# Altium PCB AX-12_PSU.PcbDoc
Units mil, origin at the board's own origin, x right, y up, seen from the top; angles counter-clockwise.
Board outline 2355 x 875 mil, 2 copper layers (Top Layer, Bottom Layer); 29 components, 14 nets, 62 pads, 63 vias.
Unrouted connection lines stored in the file: 43.
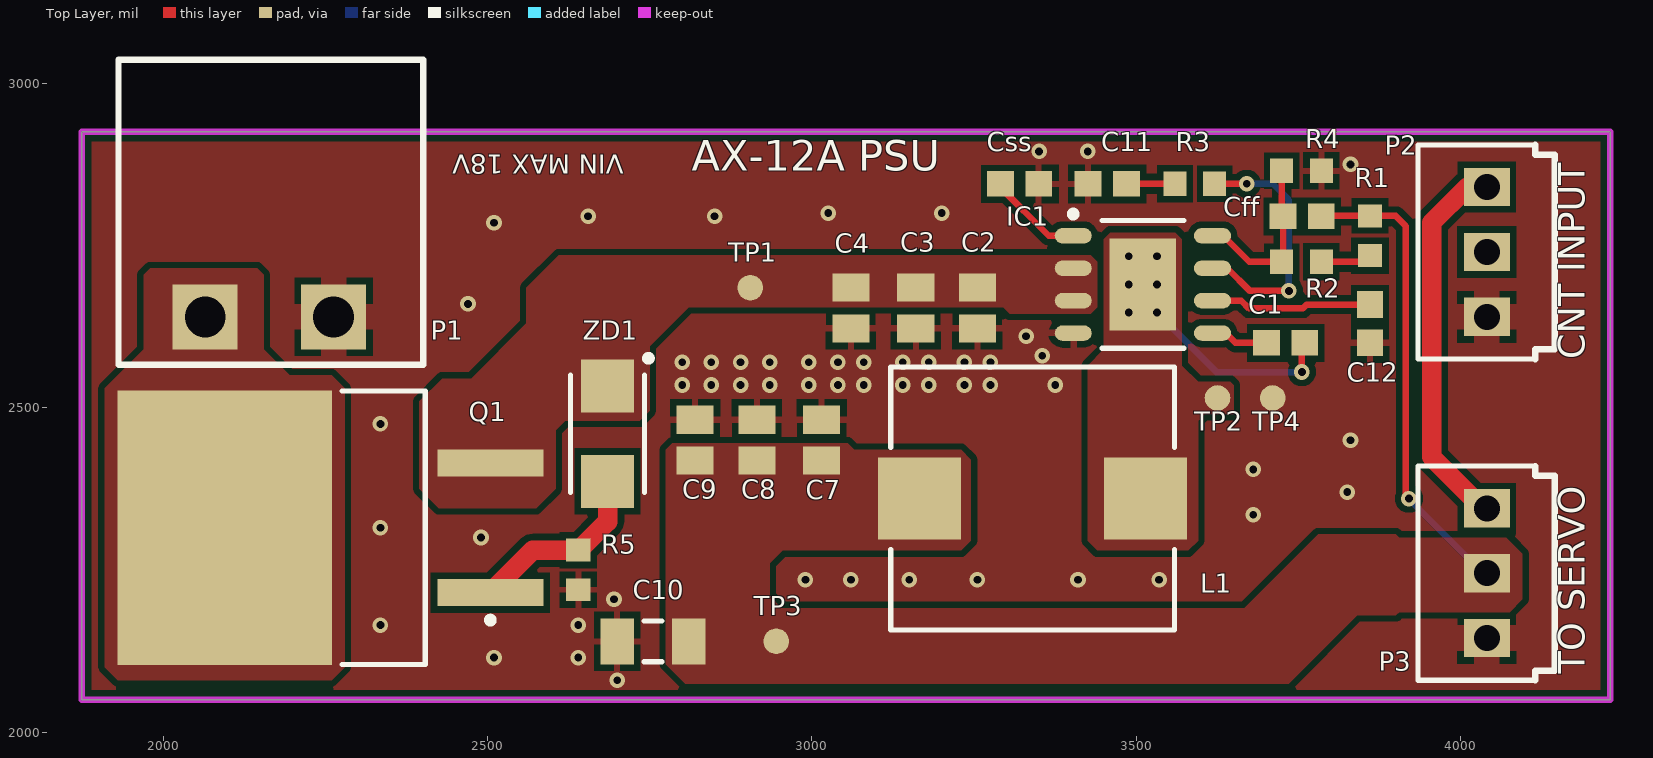
[diagram p0: Top Layer view]
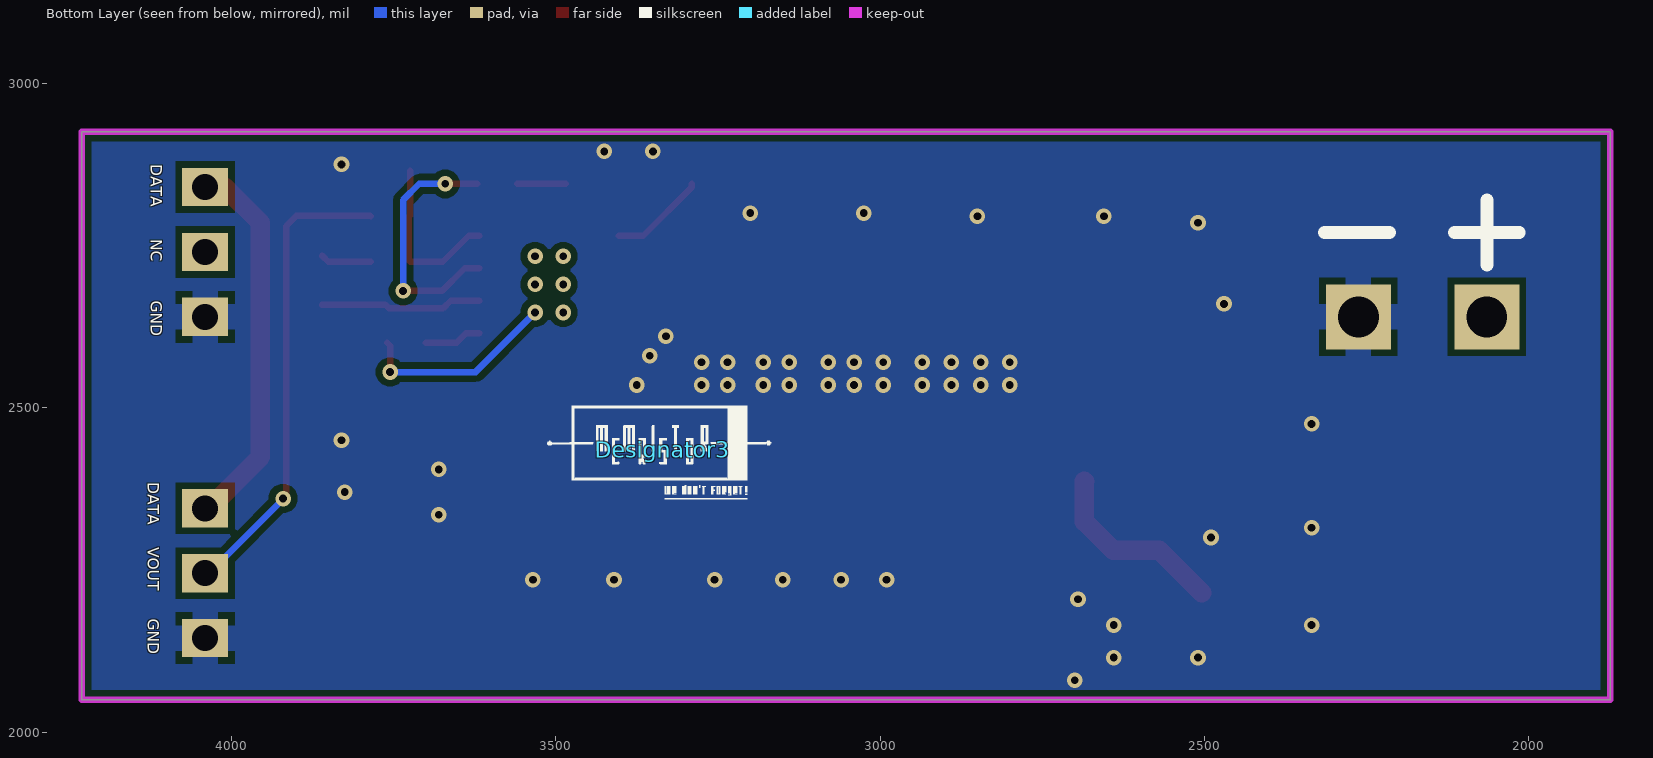
[diagram p1: Bottom Layer view, seen from below]
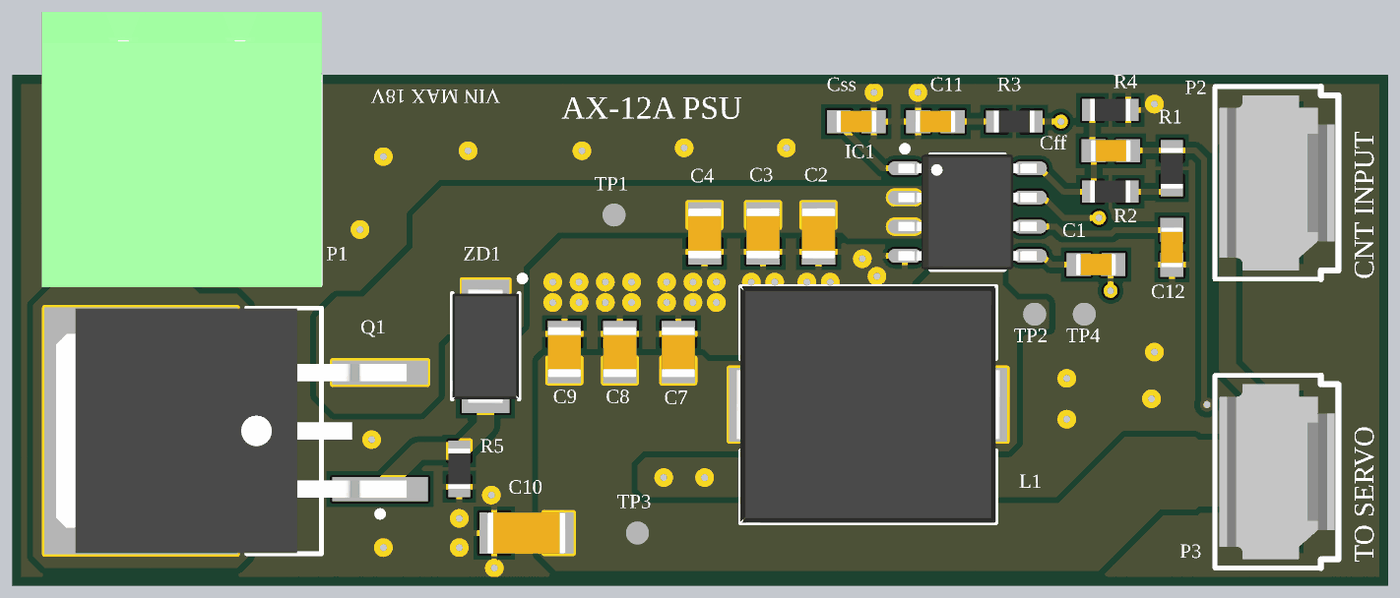
[diagram p2: 3D render of the assembled board from above, using the file's embedded part models]

## Layer stack, top to bottom
Top Solder: solder mask 0.4, Solder Resist, Dk 3.5
Top Layer: signal copper 1.4
Dielectric 1: dielectric 12.6, FR-4, Dk 4.8
Bottom Layer: signal copper 1.4
Bottom Solder: solder mask 0.4, Solder Resist, Dk 3.5

## Board outline
1875,2050 1875,2925 4230,2925 4230,2050

## Design rules (kind name [scope] priority, off if disabled: settings)
Clearance [All] p1: gap=10 ignorepadtopadclearanceinfootprint=FALSE except(0: Arc-Hole Track-Hole SMDPad-Hole THPad-Hole Via-Hole Fill-Hole Poly-Hole Region-Hole Text-Hole)
PolygonConnect PolygonConnect_3 [InNet('NetP1_2')] p1: connectstyle=Direct reliefconductorwidth=10 reliefentries=4 polygonreliefangle="90 Angle" airgapwidth=10
PolygonConnect PolygonConnect_2 [HasFootprint('TestPoint')] p2: connectstyle=Direct reliefconductorwidth=10 reliefentries=4 polygonreliefangle="90 Angle" airgapwidth=10
PolygonConnect PolygonConnect_1 [InNetClass('HIGH_current')] p3: connectstyle=Direct reliefconductorwidth=10 reliefentries=4 polygonreliefangle="90 Angle" airgapwidth=10
PolygonConnect [InNetClass('signals')] p4: thpad.connectstyle=Relief thpad.reliefconductorwidth=40 thpad.reliefentries=4 thpad.polygonreliefangle="90 Angle" thpad.airgapwidth=10 smdpad.connectstyle=Relief smdpad.reliefconductorwidth=10 smdpad.reliefentries=4 smdpad.polygonreliefangle="90 Angle" smdpad.airgapwidth=10 via.connectstyle=Direct via.reliefconductorwidth=10 via.reliefentries=4 via.polygonreliefangle="90 Angle" via.airgapwidth=10
RoutingVias [All] p1: holewidth=12 width=24 viastyle="Through Hole" minholewidth=12 minwidth=24 maxholewidth=12 maxwidth=24
SolderMaskExpansion [All] p1: expansion=4 istentingtop=FALSE
Width [All] p1: maxlimit=50 minlimit=10 preferedwidth=30
30 further rules are at their usual default settings.

## Classes and differential pairs
net class signals: DATA FB GND NetC1_1 NetC11_2 NetC12_2 NetCss_2 NetIC1_7 NetP1_2 NetQ1_1 NetR1_1
net class HIGH_current: LX VIN VOUT
component class AX-12_PSU: C1 C2 C3 C4 C7 C8 C9 C10 C11 C12 Cff Css L1 P1 P2 P3 Q1 R1 R2 R3 R4 R5 TP1 TP2 TP3 TP4 ZD1

## Components (designator, comment, footprint, x,y, rotation, side; value= is the part's Value field where it differs from the comment)
C1 "10nf" CAP_0603 3730,2600 r0 top
C2 "22uf" CAP_0805 3255,2653.5 r90 top
C3 "10uf" CAP_0805 3160,2653.5 r90 top
C4 "4.7uf" CAP_0805 3060,2653.5 r90 top
C7 "4.7uf" CAP_0805 3015,2450 r270 top
C8 "10uf" CAP_0805 2915,2450 r270 top
C9 "22uf" CAP_0805 2820,2450 r270 top
C10 "33uf" CAP_1206 2755,2140 r0 top
C11 "2.2nf" CAP_0603 3455,2845 r0 top
C12 "100nf" CAP_0603 3860,2629.53 r90 top
Cff "12pf" CAP_0603 3755.47,2795 r0 top
Css "10nf" CAP_0603 3320,2845 r180 top
Designator3 "Comment" Memristor_LOGO_small 3335,2435 r180 bottom
IC1 "AOZ6606PI" SOP127P600X170_HS-9N 3510,2690 r0 top
L1 "6.8uH" INDM108103X40N 3340,2360 r180 top
P1 "2EDGRC-5.08-02P-14-00A(H)" PWR_Con 2263,2640 r90 top
P2 "TE CONNECTIVITY_3PIN_MALE" "TE CONNECTIVITY_3PIN_MALE" 4040,2640 r90 top
P3 "TE CONNECTIVITY_3PIN_MALE" "TE CONNECTIVITY_3PIN_MALE" 4040,2145 r90 top
Q1 "IRF4905" DPAK254P1524X483-3N 2258.39,2315 r180 top
R1 "174Kohm" RES_0603 3860,2765 r90 top
R2 "1Kohm" RES_0603 3754.49,2725 r0 top
R3 "24Kohm" RES_0603 3590,2845 r0 top
R4 "10Kohm" RES_0603 3754.49,2865 r180 top
R5 "100Kohm" RES_0603 2640,2250 r90 top
TP1 "TestPoint" TestPoint 2905,2685 r90 top
TP2 "TestPoint" TestPoint 3625,2515 r90 top
TP3 "TestPoint" TestPoint 2945,2140 r90 top
TP4 "TestPoint" TestPoint 3710,2515 r90 top
ZD1 "10V" DIO_SMA 2685,2460 r270 top

## Footprints (in the part's own frame and the unit in brackets; to place one, negate y for a bottom-side part, rotate by r counter-clockwise, add the part's x,y. Pads: shape width x height; smd on the part's side, far side on the other; paste and mask are expansions set on the pad)
CAP_0603 [mm] "Chip Capacitor, 2-Leads, Body 1.60x0.80mm, IPC Medium Density"
  rect 1.05x1 smd: 1(-0.75,0) 2(0.75,0)
  body extent -0.87,-0.48 0.87,0.48, height 0.8
CAP_0805 [mm] "Chip Capacitor, 2-Leads, Body 2.00x1.25mm, IPC Medium Density"
  rect 1.1x1.45 smd: 1(-0.8,0) 2(0.8,0)
  body extent -1.1,-0.72 1.1,0.72, height 0.6
CAP_1206 [mm] "Chip Capacitor, 2-Leads, Body 3.20x1.60mm, IPC Medium Density"
  rect 1.3x1.8 smd: 1(-1.4,0) 2(1.4,0)
  silkscreen extent -0.35,-0.8 0.35,0.8, body extent -1.7,-0.9 1.7,0.9, height 0.9
DIO_SMA [mm] "Molded Diode, 2-Leads, Body 4.30x2.70mm, IPC Medium Density"
  rect 2.07x2.06 smd: 1(-1.865,0) 2(1.865,0)
  silkscreen extent -3.07,-1.45 2.3,1.73, body extent -2.52,-1.45 2.52,1.45, height 2.44
DPAK254P1524X483-3N [mm] "D2-PAK, 3-Pads, Body 7.93x8.70mm (max), IPC Medium Density"
  rect 4.15x1.05 smd: 1(-6.25,2.54) 3(-6.25,-2.54)
  rect 8.4x10.75 smd: 4(4.15,0)
  silkscreen extent -6.38,-5.35 -0.45,5.35, body extent -7.41,-5.33 7.84,5.33, height 4.83
INDM108103X40N [mm] "Molded Inductor, 2-Leads, Body 10.80x10.31mm, IPC Medium Density"
  rect 3.25x3.2 smd: 1(-4.425,0) 2(4.425,0)
  silkscreen extent -5.55,-5.15 5.55,5.15, body extent -5.77,-5.15 5.77,5.15, height 4
Memristor_LOGO_small [mil]
  silkscreen extent -178,-76 167,67
PWR_Con [mm]
  rect 2.54x2.54 hole 1.6: 1(0,0) 2(0,5.029)
  silkscreen extent -1.88,-3.51 10.06,8.42, body extent -2.01,-3.59 10,8.57, height 8.73
RES_0603 [mm] "Chip Resistor, 2-Leads, Body 1.60x0.80mm, IPC Medium Density"
  rect 0.9x0.95 smd: 1(-0.775,0) 2(0.775,0)
  body extent -0.87,-0.48 0.87,0.48, height 0.8
SOP127P600X170_HS-9N [mm] "SOP, 8-Leads, Body 4.90x3.90mm, Pitch 1.27mm, Thermal Pad 3.60x2.61mm, IPC Medium Density"
  oval 1.45x0.6 smd: 1(-2.725,1.905) 2(-2.725,0.635) 3(-2.725,-0.635) 4(-2.725,-1.905) 5(2.725,-1.905) 6(2.725,-0.635) 7(2.725,0.635) 8(2.725,1.905)
  rect 2.61x3.6 smd: 9(0,0)
  silkscreen extent -2.85,-2.5 1.6,2.88, body extent -3,-2.5 3,2.5, height 1.7
"TE CONNECTIVITY_3PIN_MALE" [mm] "BLUE_3PIN_CONECTOR"
  rect 1.5x1.8 hole 1.016: 1(0,0) 2(2.54,0) 3(5.08,0)
  silkscreen extent -1.65,-2.67 6.73,2.7, body extent -1.27,-2.5 6.35,2.5, height 11.43
TestPoint [mm] "1mm"
  round 1 smd mask+0: 1(0,0)

## Part data
C1 Css: library part 0000005, "CAP CER 10nF 0603 25V X7R", capaticanse=10nf, ComponentLink1Description=digikey, ComponentLink1URL=https://www.digikey.com/en/products/detail/kyocera-avx/06033C103MAT2A/1599370
C2 C9: library part 0000001, "CAP CER 22uF 0805 25V X5R", capaticanse=22uf, ComponentLink1Description=digikey, ComponentLink1URL=https://www.digikey.com/en/products/detail/tdk-corporation/C2012X5R1E226M125AC/3661564
C3 C8: library part 0000002, "CAP CER 10uF 0805 25V X5R", capaticanse=10uf, ComponentLink1Description=digikey, ComponentLink1URL=https://www.digikey.com/en/products/detail/tdk-corporation/C2012X5R1E106K125AB/2443462
C4 C7: library part 0000003, "CAP CER 4.7uF 0805 25V X5R", capaticanse=4.7uf, ComponentLink1Description=digikey, ComponentLink1URL=https://www.digikey.com/en/products/detail/kemet/C0805C475K3PAC7800/1950665
C10: library part 0000004, "CAP CER 33uF 1206 25V X5R", capaticanse=33uf, ComponentLink1Description=digikey, ComponentLink1URL=https://www.digikey.com/en/products/detail/tdk-corporation/C3216X5R1E336M160AC/2792259
C11: library part 0000006, "CAP CER 2.2nF 0603 25V X7R", capaticanse=2.2nf, ComponentLink1Description=digikey, ComponentLink1URL=https://www.digikey.com/en/products/detail/yageo/CC0603KRX7R8BB222/2345066
C12: library part 0000007, "CAP CER 100nF 0603 25V X7R", capaticanse=100nf, ComponentLink1Description=digikey, ComponentLink1URL=https://www.digikey.com/en/products/detail/kyocera-avx/06033C104K4T2A/8019250
Cff: library part 0000008, "CAP CER 12pF 0603 25V X7R", capaticanse=12pf, ComponentLink1Description=digikey, ComponentLink1URL=https://www.digikey.com/en/products/detail/kemet/C0603C120J3GACAUTO/11675595
L1: library part L000002, "IND 6.8uH 8A 23.3mOHM 13.5A ISAT", ComponentLink1Description=digikey, ComponentLink1URL=https://www.digikey.com/en/products/detail/vishay-dale/IHLP4040DZER6R8M01/1220696, inductanse=6.8uH
P1: library part 00000002, "TERM BLOCK HDR 2POS 90DEG 5.08MM", Manufacturer Part Number=2EDGRC-5.08-02P-14-00A(H), Price=0.1304, Suplier=TME, Suplier Product Link=https://www.tme.eu/en/details/2edgrc5.08-2p14/pluggable-terminal-blocks/degson-electronics/2edgrc-508-02p-14-00ah/
P2 P3: "BLUE_3PIN_CONECTOR", Manufacturer="TE CONNECTIVITY / AMP", Manufacturer Part Number 1=281695-3, Order Code 1=1205983, Price 1=£0.403, Supplier 1=uk.farnell.com
Q1: Case/Package=D2PAK, Continuous Drain Current (ID)=75A, Current Rating=49A, Drain to Source Breakdown Voltage=40V, Drain to Source Resistance=4mR, Drain-source On Resistance-Max=3.7MR, Dual Supply Voltage=55V, Gate to Source Voltage (Vgs)=20V, Input Capacitance=4.34nF, Manufacturer="International Rectifier", Manufacturer Part Number=IRF1404ZSPBF, Max Operating Temperature=175°C, Max Power Dissipation=200W, Min Operating Temperature=-55°C, Package Quantity=50, Power Dissipation=220W, Threshold Voltage=4V, Category=MOSFETs, Drain to Source Voltage (Vdss)=40V, Element Configuration=Single, Fall Time=58ns, Height=4.83mm, Lead Free="Lead Free", Length=10.67mm, Mount="Surface Mount", Nominal Vgs=4V, Number of Elements=1, Number of Pins=3, On-State Resistance=3.7MR, Packaging=Rail/Tube, Polarity=N-CHANNEL, Radiation Hardening=No, Rds On Max=3.7mR, REACH SVHC="No SVHC", Recovery Time=42ns, Rise Time=110ns, RoHS Compliant=Yes, Series=HEXFET®, Termination=SMD/SMT, Turn-Off Delay Time=36ns, Turn-On Delay Time=18ns, Voltage Rating (DC)=55V, Width=9.65mm
R1: library part R000003, "RES 174K OHM 1% 1/10W 0603", ComponentLink1Description=digikey, ComponentLink1URL=https://www.digikey.com/en/products/detail/stackpole-electronics-inc/RMCF0603FT174K/1761066, resistance=174Kohm
R2: library part R000004, "RES 1K OHM 1% 1/10W 0603", ComponentLink1Description=digikey, ComponentLink1URL=https://www.digikey.com/en/products/detail/vishay-beyschlag-draloric-bc-components/MCT06030C1001FP500/2607821, resistance=1Kohm
R3: library part R000005, "RES 24K OHM 1% 1/10W 0603", ComponentLink1Description=digikey, ComponentLink1URL=https://www.digikey.com/en/products/detail/stackpole-electronics-inc/RMCF0603FG24K0/1713826, resistance=24Kohm
R4: library part R000001, "RES 10K OHM 1% 1/10W 0603", ComponentLink1Description=digikey, ComponentLink1URL=https://www.digikey.com/en/products/detail/vishay-beyschlag-draloric-bc-components/MCT06030C1002FP500/1850440, resistance=10Kohm
R5: library part R000006, "RES 100K OHM 1% 1/10W 0603", ComponentLink1Description=digikey, ComponentLink1URL=https://www.digikey.com/en/products/detail/stackpole-electronics-inc/RMCF0603FG100K/1713543, resistance=100Kohm
TP1 TP2 TP3 TP4: library part TP001
ZD1: library part 1SMA5931-AU_R1, "Zener Diode 10 V 5 W ±5% Surface Mount SMC (DO-214AB)", ComponentLink1Description=digikey, ComponentLink1URL=https://www.digikey.com/en/products/detail/panjit-international-inc/1SMC5347-AU-R1-000A1/15799564
IC1: partName=AOZ6606PI

## Via types
v1: diameter 24, hole 12, Top Layer to Bottom Layer, 62 vias
v2: diameter 24, hole 12, Top Layer to Bottom Layer, tented both sides, 1 vias

## Nets (pads, with @x,y where several pads share a name; then routed paths per layer and width w, separated by ;. In a path a pad name is that pad's centre, name@x,y a point inside that pad or via, vN(x,y) a via of type N, cw(c..) or ccw(c..) an arc to the next point about the centre after c; other vN are vias at no path point)
DATA: P2.3 P3.3 | length 586.4
  Top Layer w30: P3.3 4034.09,2345 3955,2424.09 3955,2785 4010,2840 P2.3
FB: Cff.1 IC1.8 R2.1 R4.2 | length 264.9
  Top Layer w10: IC1.8 3634.02,2765 3674.02,2725 R2.1 3725.94,2726.97 Cff.1 3723.98,2796.97 R4.2
GND: C2.1 C3.1 C4.1 C7.1 C8.1 C9.1 C10.1 C11.1 C12.1 Css.1 IC1.4 P1.1 P2.1 P3.1 R4.1 R5.1 TP4.1
  other v1: 2700,2080 2510,2115 2640,2115 2335,2165 2640,2165 2695,2205 2990,2235 3060,2235 3150,2235 3255,2235 3410,2235 3535,2235 2490,2300 2335,2315 3680,2335 3825,2370 3680,2405 3830,2450 2335,2475 2800,2535 2845,2535 2890,2535 2935,2535 2995,2535 3040,2535 3080,2535 3140,2535 3180,2535 3235,2535 3275,2535 3375,2535 2800,2570 2845,2570 2890,2570 2935,2570 2995,2570 3040,2570 3080,2570 3140,2570 3180,2570 3235,2570 3275,2570 3355,2580 3330,2610 2470,2660 2510,2785 2655,2795 2850,2795 3025,2800 3200,2800 3830,2875 3350,2895 3425,2895
LX: C1.2 IC1.9 L1.1 TP2.1 | length 310.4
  Top Layer w10: v1(3531.65,2646.69) IC1.9@3533.82,2646.69 ; v1(3755,2555) 3755,2595.47 C1.2
  Bottom Layer w10: v1(3531.65,2646.69) 3623.35,2555 v1(3755,2555)
  other v1: 3488.35,2646.69 3488.35,2690 3531.65,2690 3488.35,2733.31 3531.65,2733.31
NetC1_1: C1.1 IC1.5 | length 89.4
  Top Layer w10: IC1.5 3637.7,2615 3652.7,2600 C1.1
NetC11_2: C11.2 R3.1 | length 75
  Top Layer w10: C11.2 R3.1
NetC12_2: C12.2 IC1.6 | length 250.2
  Top Layer w10: IC1.6 3661.72,2665 3673.72,2653 3756.49,2653 3762.54,2659.06 C12.2
NetCss_2: Css.2 IC1.1 | length 148.6
  Top Layer w10: Css.2 3290.47,2839.53 3365,2765 IC1.1
NetIC1_7: IC1.7 R3.2 | length 397.1
  Top Layer w10: IC1.7 3640,2715 3675,2680 v1(3735,2680) ; R3.2 v1(3670,2845)
  Bottom Layer w10: v1(3670,2845) 3710,2845 3735,2820 v1(3735,2680)
NetP1_2: P1.2 Q1.4
NetQ1_1: Q1.1 R5.2 ZD1.2 | length 288.2
  Top Layer w30: Q1.1 2569.96,2280.51 R5.2 2640.98,2280.51 2685,2324.53 2685,2386.06 2684.74,2386.32 ZD1.2
NetR1_1: R1.1 R2.2 | length 78.9
  Top Layer w10: R2.2 3850.51,2725 R1.1
VIN: C2.2 C3.2 C4.2 IC1.2 IC1.3 Q1.3 TP1.1 ZD1.1
VOUT: C7.2 C8.2 C9.2 C10.2 Cff.2 L1.2 P3.2 R1.2 TP3.1 | length 726.9
  Top Layer w10: Cff.2 3785.51,2795.51 R1.2 3899.49,2795.51 3915,2780 3915,2365 v2(3920,2360)
  Bottom Layer w10: v2(3920,2360) 3920,2359.09 4034.09,2245 P3.2
pads on no net: P2.2

## Polygon pours and split planes (outlines as drawn)
GND on Top Layer "GND_TOP" (solid, pour order 5): 1875,2050 1875,2925 4230,2925 4230,2050
NetP1_2 on Top Layer "NETP1_2_L01_P004" (solid, pour order 4): 1980,2715 1970,2705 1970,2590 1910,2530 1910,2100 1930,2080 2260,2080 2280,2100 2280,2530 2260,2550 2195,2550 2155,2590 2155,2705 2145,2715
VIN on Top Layer "VIN_L01_P003" (solid, pour order 3): 2605,2375 2605,2465 2620,2480 2735,2480 2750,2495 2750,2595 2810,2655 3295,2655 3305,2645 3430,2645 3440,2655 3440,2725 3430,2735 2610,2735 2560,2685 2560,2630 2475,2545 2430,2545 2395,2510 2395,2375 2425,2345 2575,2345
VOUT on Top Layer "VOUT_L01_P001" (solid, pour order 1): 3245,2420 3230,2435 3065,2435 3055,2445 2785,2445 2775,2435 2775,2105 2805,2075 3735,2075 3840,2180 3900,2180 3905,2185 4075,2185 4095,2205 4095,2275 4070,2300 3905,2300 3900,2305 3780,2305 3666.33,2191.33 2953.67,2191.33 2935,2210 2935,2260 2955,2280 3230,2280 3245,2295
LX on Top Layer "LX_L01_P000" (solid, pour order 0): 3560,2770 3570,2760 3570,2565 3595,2540 3645,2540 3650,2535 3650,2490 3645,2490 3640,2490 3605,2490 3595,2480 3595,2295 3580,2280 3440,2280 3425,2295 3425,2565 3450,2590 3450,2760 3460,2770
GND on Bottom Layer "GND_BOT" (solid, pour order 6): 1875,2050 1875,2925 4230,2925 4230,2050

## Keep-outs
Keep-Out Layer:
  lines w10: 1875,2050 1875,2925 3735,2925 3790,2925 4230,2925 4230,2050 3790,2050 3735,2050 1875,2050

## Silkscreen, mask and mechanical layers (free items; w line width, h text height)
Top Overlay:
  text "VIN MAX 18V" at 2710,2900 h50 r180
  text "AX-12A PSU" at 2815,2850 h80
  text "CNT INPUT" at 4205,2575 h70 r90
  text "TO SERVO" at 4205,2090 h70 r90
Bottom Overlay:
  lines w20: 2015,2770 2115,2770 ; 2065,2720 2065,2820 ; 2215,2770 2240,2770 2290,2770 2315,2770
  text "DATA" at 4130,2875 h30 r90
  text "NC" at 4130,2760 h30 r90
  text "GND" at 4130,2665 h30 r90
  text "DATA" at 4135,2385 h30 r90
  text "VOUT" at 4135,2285 h30 r90
  text "GND" at 4135,2175 h30 r90